# EAGLE board Placa de Baixo (EAGLE 9.3.0)
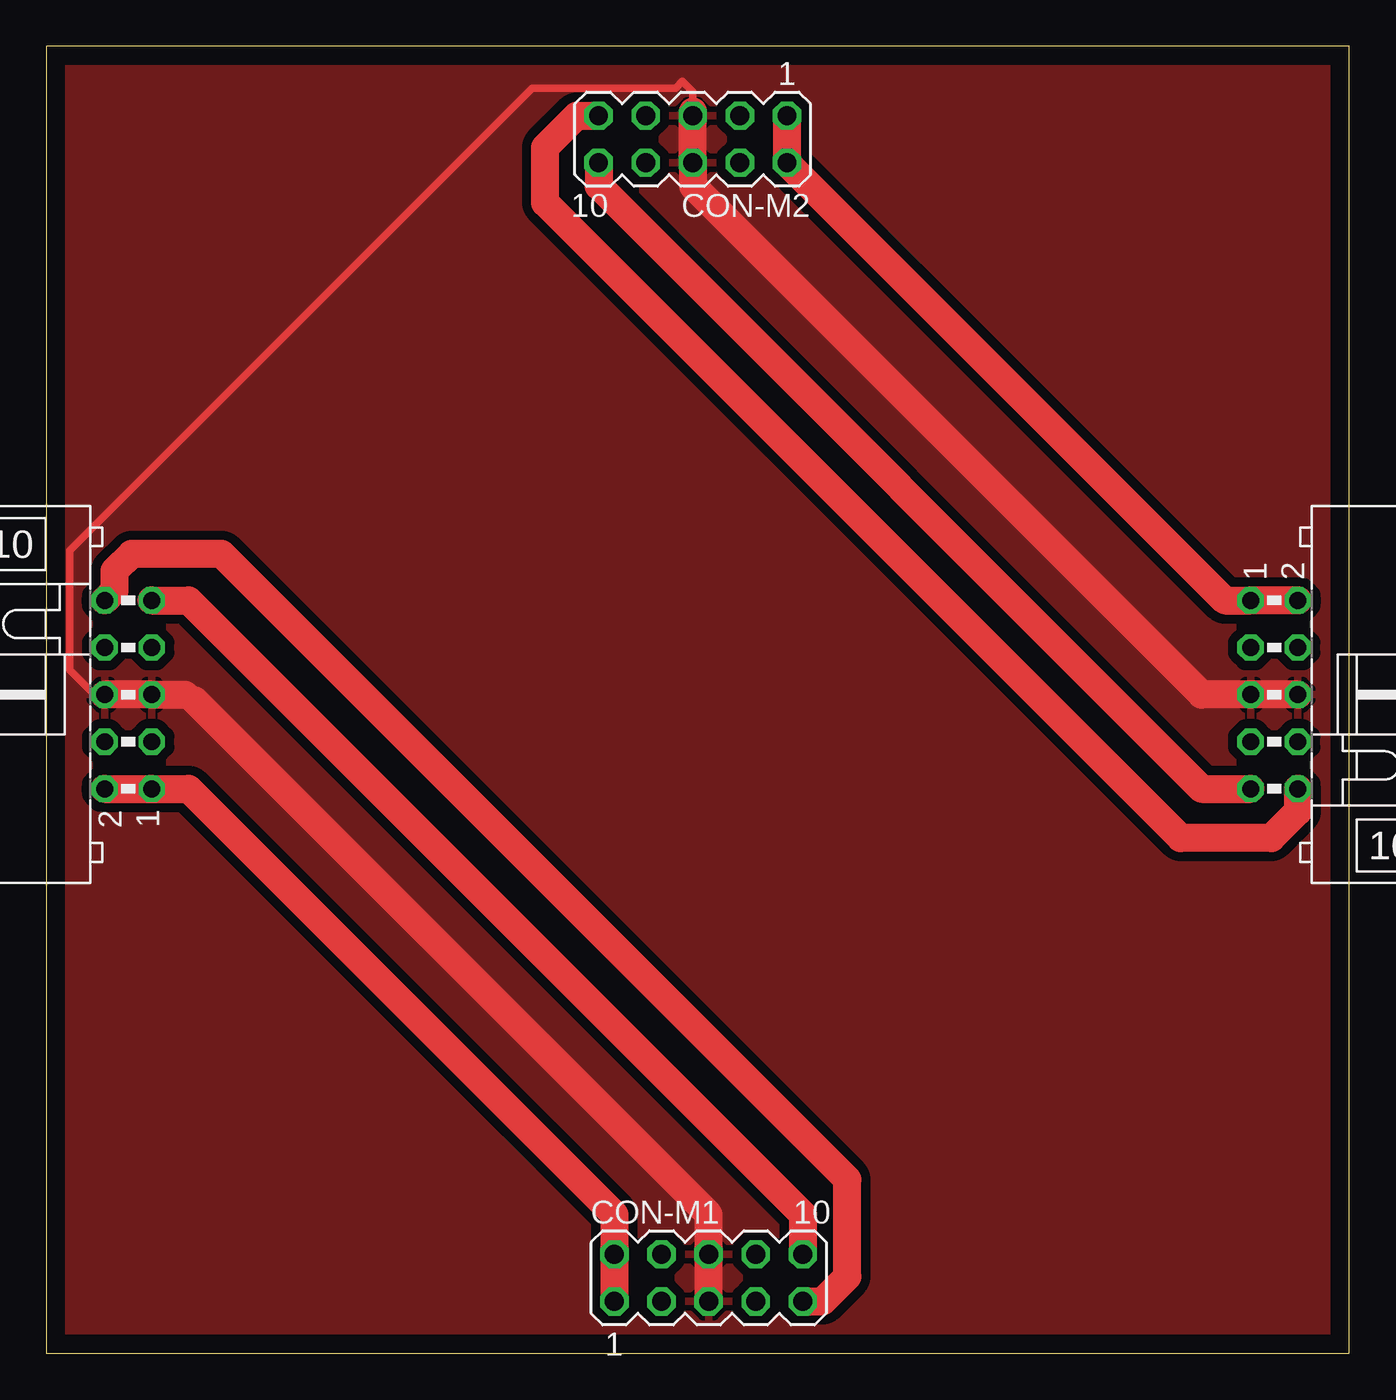
[diagram p0: board, top side]

Size 70.23 x 70.47 mm. Coordinates in mm from the lower left corner, seen from the top.
Outline: 0,0 70.23,0 70.23,70.47 0,70.47 0,0
Copper layers (1*16): Top 0.035mm / dielectric 1.5mm / Bottom 0.035mm
Design rules "default *": minimum track width 10mil, minimum drill 24mil, track to track 20mil, track to pad 20mil, pad to pad 20mil, via to via 20mil, smd to smd 20mil, copper to edge 40mil, drill to drill 8mil, minimum pad ring 10mil, minimum via ring 8mil, stop-mask expansion 4mil, vias tented up to drill 0mil, thermal gap 10mil

## Footprints (pad centres in the part's own frame; a part is rotated, then mirrored left to right if it is on the bottom)
MA05-2 = drill 1.016 octagon: 1 -5.08,-1.27; 2 -5.08,1.27; 3 -2.54,-1.27; 4 -2.54,1.27; 5 0,-1.27; 6 0,1.27; 7 2.54,-1.27; 8 2.54,1.27; 9 5.08,-1.27; 10 5.08,1.27
ML10L = drill 0.914 octagon: 1 -5.08,-1.27; 2 -5.08,1.27; 3 -2.54,-1.27; 4 -2.54,1.27; 5 0,-1.27; 6 0,1.27; 7 2.54,-1.27; 8 2.54,1.27; 9 5.08,-1.27; 10 5.08,1.27

## Placement (x,y rotation side)
CON-M1  [MA05-2]  35.7,4.06 0 top
CON-M2  [MA05-2]  34.84,65.46 180 top
ENCAIXE1  [ML10L]  4.41,35.51 90 top
ENCAIXE2  [ML10L]  66.19,35.51 270 top

## Library data of the parts
CON-M1 CON-M2 = con-lstb; OC_FARNELL: unknown; OC_NEWARK: unknown
ENCAIXE1 ENCAIXE2 = con-ml; OC_FARNELL: unknown; OC_NEWARK: unknown

## Nets
COMANDO-1: CON-M1.9 ENCAIXE1.10
COMANDO-2: CON-M1.10 ENCAIXE1.9
COMANDO-A: CON-M2.9 ENCAIXE2.10
COMANDO-B: CON-M2.10 ENCAIXE2.9
GND: CON-M1.5 CON-M1.6 CON-M2.5 CON-M2.6 ENCAIXE1.5 ENCAIXE1.6 ENCAIXE2.5 ENCAIXE2.6
S1-M1: CON-M1.1 CON-M1.2 ENCAIXE1.1 ENCAIXE1.2
S2-M2: CON-M2.1 CON-M2.2 ENCAIXE2.1 ENCAIXE2.2

## Tracks (layer width: path | path; a pad name or v marks a point on that pad's centre or on a via)
COMANDO-1
  Top 1.5: CON-M1.9 41.85,2.79 43.18,4.12 43.18,9.37 9.45,43.1 4.59,43.1 3.67,42.18 3.67,41.12 ENCAIXE1.10
COMANDO-2
  Top 0.406: ENCAIXE1.9 7.57,40.59 7.62,40.64 7.89,40.37 40.78,7.48
  Top 1.5: ENCAIXE1.9 7.67,40.59 7.89,40.37 40.78,7.48 CON-M1.10
COMANDO-A
  Top 1.5: ENCAIXE2.10 67.46,29.2 66.04,27.78 61.15,27.78 26.89,62.04 26.89,65.03 28.59,66.73 CON-M2.9
COMANDO-B
  Top 1.5: ENCAIXE2.9 62.28,30.43 29.76,62.95 CON-M2.10
GND
  Top 0.406: CON-M2.6 CON-M2.5 34.84,66.95 34.84,68.03 34.29,68.58 33.91,68.2 26.2,68.2 1.27,43.27 1.27,36.83 2.59,35.51 ENCAIXE1.6 | CON-M1.5 CON-M1.6 35.7,5.46 35.7,7.48 | 34.84,62.95 34.95,62.84 | 7.47,35.51 7.67,35.51 7.99,35.2 | 3.76,35.56 3.81,35.51
  Top 1.5: 34.95,62.84 62.28,35.51 ENCAIXE2.5 ENCAIXE2.6 | 34.84,62.95 CON-M2.6 34.84,66.95 | CON-M1.5 35.7,5.46 | CON-M1.6 35.7,7.48 7.99,35.2 | 7.47,35.51 ENCAIXE1.5 ENCAIXE1.6
  pour Top: 0,0 71.12,0 71.12,68.58 69.85,69.85 0,69.85
S1-M1
  Top 0.406: 5.65,30.43 ENCAIXE1.1 | CON-M1.1 CON-M1.2 30.62,7.48
  Top 1.5: ENCAIXE1.2 5.65,30.43 | ENCAIXE1.1 7.67,30.43 30.62,7.48 CON-M1.1
S2-M2
  Top 1.5: CON-M2.1 CON-M2.2 63.53,40.59 ENCAIXE2.1 ENCAIXE2.2